# Altium PCB PCB.PcbDoc
Units mm, origin at the board's own origin, x right, y up, seen from the top; angles counter-clockwise.
Board outline 33 x 21 mm, 2 copper layers (Top Layer, Bottom Layer); 34 components, 34 nets, 136 pads, 32 vias.
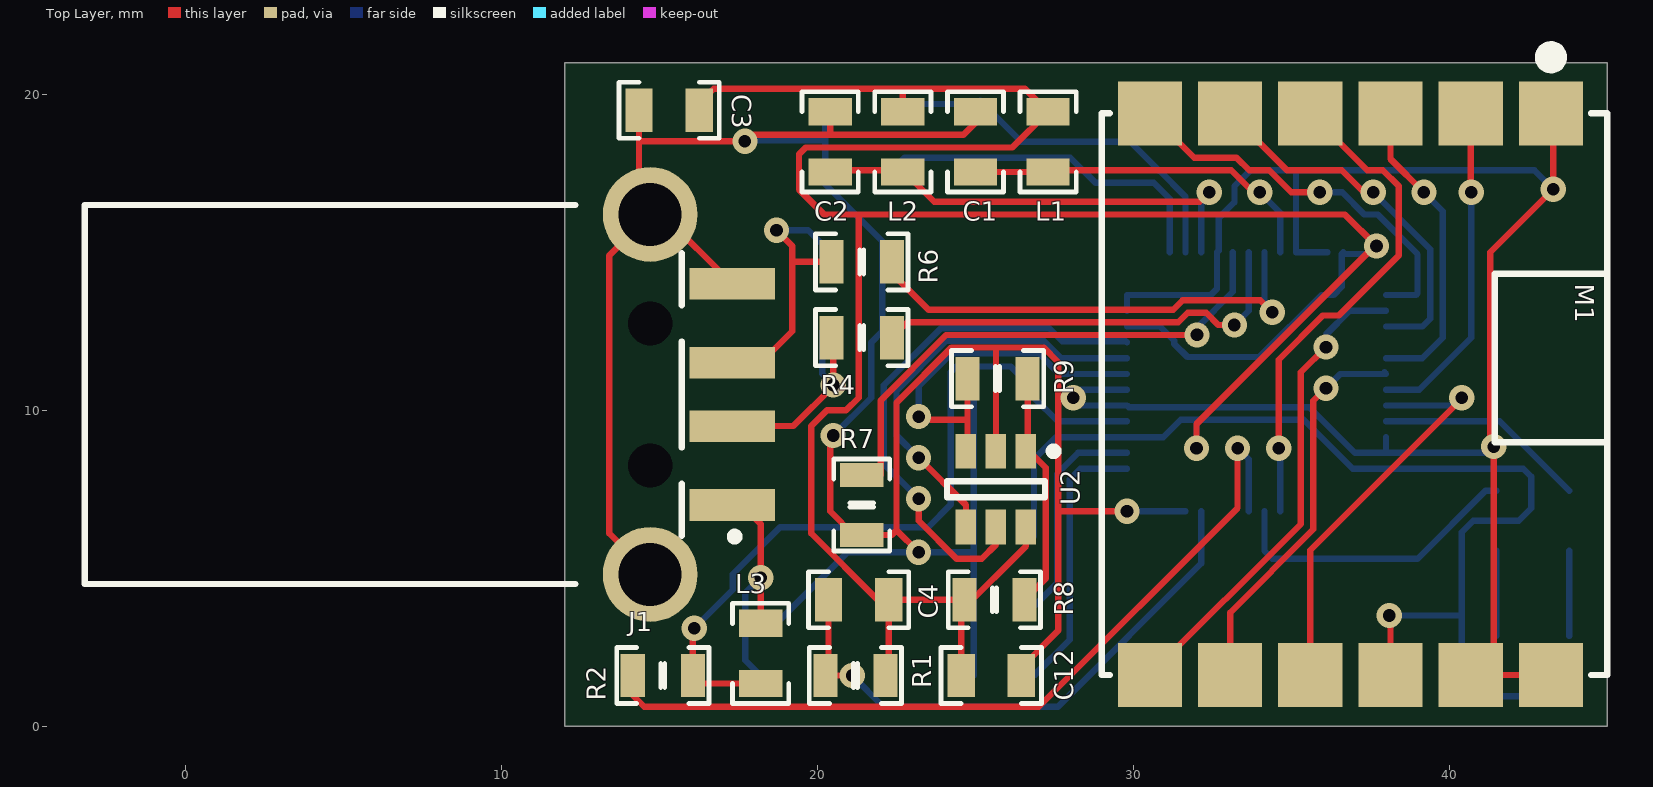
[diagram p0: Top Layer view]
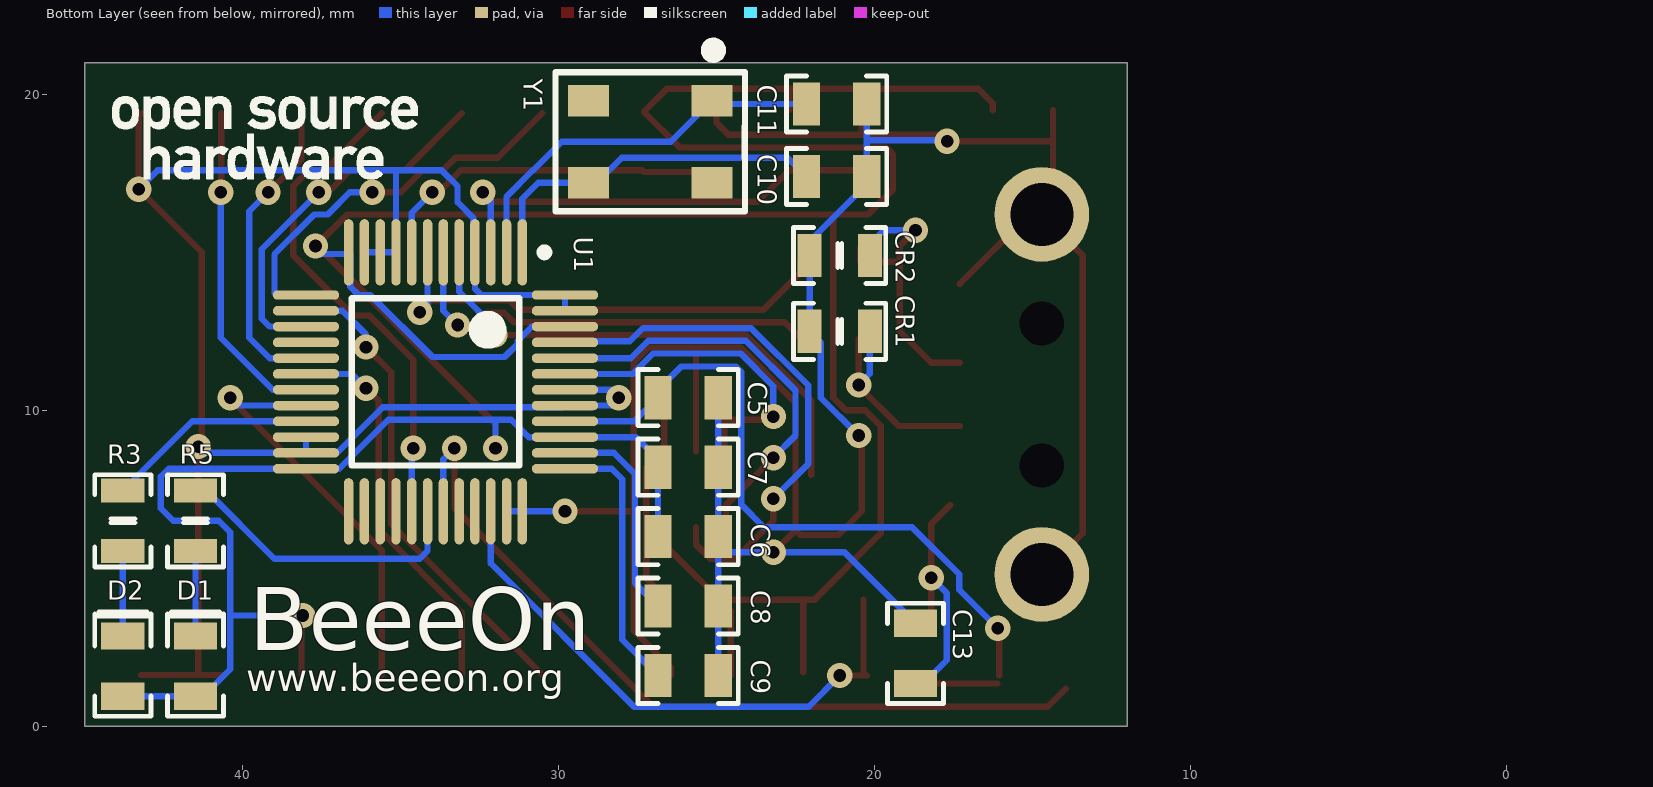
[diagram p1: Bottom Layer view, seen from below]

## Layer stack, top to bottom
Top Layer: signal copper 0.0356
Dielectric: dielectric 0.32, FR-4, Dk 4.8
Bottom Layer: signal copper 0.0356

## Board outline
12,21 12,0 45,0 45,21

## Design rules (kind name [scope] priority, off if disabled: settings)
Clearance [All] p1: gap=0.2
HoleSize [All] p1: absolutevalues=TRUE maxlimit=2.54 minlimit=0.4 maxpercent=80.000 minpercent=20.000
HoleToHoleClearance [All] p1: gap=0.4 allowstackedmicrovias=TRUE
MinimumSolderMaskSliver [All] p1: minsoldermaskwidth=0.2
PolygonConnect [All] p1: connectstyle=Direct reliefconductorwidth=0.254 reliefentries=4 polygonreliefangle="90 Angle"
RoomDefinition system [InComponentClass('system')] p1 off: confinementstyle=ConfineIn formatcopy=TRUE lockcomponents=FALSE outline 12.7,24.5 28.1,24.5 28.1,31.7 12.7,31.7
RoutingVias [All] p1: holewidth=0.4 width=0.8 viastyle="Through Hole" minholewidth=0.4 minwidth=0.8 maxholewidth=2 maxwidth=2
SilkToSilkClearance [All] p1: silktosilkclearance=0.1
SilkscreenOverComponentPads [All] p1: minsilkscreentomaskgap=0.1
SolderMaskExpansion [All] p1: expansion=0.102
Width [All] p1: maxlimit=1 minlimit=0.2 preferedwidth=0.2
23 further rules are at their usual default settings.

## Components (designator, comment, footprint, x,y, rotation, side; value= is the part's Value field where it differs from the comment)
C1 "100nF" C0805 25,18.5 r90 top
C2 "100nF" C0805 20.4,18.5 r90 top
C3 "100nF" C0805 15.3,19.5 r0 top
C4 "100nF" C0805 21.3,4 r180 top
C5 "100nF" C0805 25.9,10.4 r180 bottom
C6 "4.7uF" C0805 25.9,6 r180 bottom
C7 "100n" C0805 25.9,8.2 r180 bottom
C8 "100n" C0805 25.9,3.8 r180 bottom
C9 "100n" C0805 25.9,1.6 r180 bottom
C10 "27pF" C0805 21.2,17.4 r180 bottom
C11 "27pF" C0805 21.2,19.7 r180 bottom
C12 "100n" C0805 25.5,1.6 r180 top
C13 "10nF" C0805 18.7,2.3 r270 bottom
CR1 "VC080505A150" R0805 21.1,12.5 r180 bottom
CR2 "VC080505A150" R0805 21.1,14.9 r180 bottom
D1 "LED" D0805 41.5,1.9 r270 bottom
D2 "LED" D0805 43.8,1.9 r270 bottom
J1 "USB-A-REC" USB/SM2.5-4H4A 12,10.5 r180 top locked
L1 "600R/0.5A" L0805 27.3,18.5 r270 top
L2 "600R/0.5A" L0805 22.7,18.5 r270 top
L3 "600R/0.5A" L0805 18.2,2.3 r270 top
M1 "MRF89XAM8A" MRF89XAM8A 29,19.4 r270 top locked
R1 "10k" R0805 21.2,1.6 r0 top
R2 "39k" R0805 15.1,1.6 r180 top
R3 "1k" R0805 43.8,6.5 r270 bottom
R4 "10R" R0805 21.4,12.3 r0 top
R5 "1k" R0805 41.5,6.5 r270 bottom
R6 "10R" R0805 21.4,14.7 r0 top
R7 "12k" R0805 21.4,7 r90 top
R8 "10k" R0805 25.6,4 r180 top
R9 "2k" R0805 25.7,11 r0 top
U1 "FT232HL" LQFP-48_M 33.9,10.9 r270 bottom locked
U2 "93LC56BT-I/OT" SOT-23-OT6_N 25.65,7.5 r270 top
Y1 "12MHz" "OSC 5.0X3.2" 27.1,18.5 r270 bottom

## Footprints (in the part's own frame and the unit in brackets; to place one, negate y for a bottom-side part, rotate by r counter-clockwise, add the part's x,y. Pads: shape width x height; smd on the part's side, far side on the other; paste and mask are expansions set on the pad)
C0805 [mil] "Capacitor SMD 0805; 2.0 x 1.2 mm"
  rect 34x54 smd: 1(-37.5,0) 2(37.5,0)
  silkscreen extent -62,-35 62,35, body extent -39,-24 43,24, height 69
D0805 [mil] "LED SMD 0805; 2.0 x 1.2 mm"
  rect 34x54 smd: 1(37.5,0) 2(-37.5,0)
  silkscreen extent -68,-35 63,35, body extent -39,-24 43,24, height 69
L0805 [mil] "Inductor SMD 0805; 2.0 x 1.2 mm"
  rect 34x54 smd: 1(-37.5,0) 2(37.5,0)
  silkscreen extent -63,-35 63,35, body extent -39,-24 43,24, height 69
LQFP-48_M [mm] "48-Pin Thin Quad Flat Pack 0.5 mm Pitch, IPC Low Density"
  oval 2.1x0.3 smd: 1(-4.1,2.75) 2(-4.1,2.25) 3(-4.1,1.75) 4(-4.1,1.25) 5(-4.1,0.75) 6(-4.1,0.25) 7(-4.1,-0.25) 8(-4.1,-0.75) 9(-4.1,-1.25) 10(-4.1,-1.75) 11(-4.1,-2.25) 12(-4.1,-2.75) 25(4.1,-2.75) 26(4.1,-2.25) 27(4.1,-1.75) 28(4.1,-1.25) 29(4.1,-0.75) 30(4.1,-0.25) 31(4.1,0.25) 32(4.1,0.75) 33(4.1,1.25) 34(4.1,1.75) 35(4.1,2.25) 36(4.1,2.75)
  oval 0.3x2.1 smd: 13(-2.75,-4.1) 14(-2.25,-4.1) 15(-1.75,-4.1) 16(-1.25,-4.1) 17(-0.75,-4.1) 18(-0.25,-4.1) 19(0.25,-4.1) 20(0.75,-4.1) 21(1.25,-4.1) 22(1.75,-4.1) 23(2.25,-4.1) 24(2.75,-4.1) 37(2.75,4.1) 38(2.25,4.1) 39(1.75,4.1) 40(1.25,4.1) 41(0.75,4.1) 42(0.25,4.1) 43(-0.25,4.1) 44(-0.75,4.1) 45(-1.25,4.1) 46(-1.75,4.1) 47(-2.25,4.1) 48(-2.75,4.1)
  silkscreen extent -4.22,-2.65 2.65,3.57, body extent -3.5,-3.5 3.5,3.5, height 1.45
MRF89XAM8A [mil] "868MHz Ultra-Low Power  Sub-GHz Transceiver Module"
  rect 80x80 smd: 1(0,560) 2(0,460) 3(0,360) 4(0,260) 5(0,160) 6(0,60) 7(700,60) 8(700,160) 9(700,260) 10(700,360) 11(700,460) 12(700,560)
  silkscreen extent -80,0 700,630, body extent 0,0 700,1100, height 5
"OSC 5.0X3.2" [mm] "Oscilator Ceramic Package 5.0x3.2 mm"
  rect 1x1.3 smd: 1(-1.3,1.95) 2(-1.3,-1.95) 3(1.3,-1.95) 4(1.3,1.95)
  silkscreen extent -3.1,-3 2.2,3, body extent -1.6,-2.5 1.6,2.5, height 1.75
R0805 [mil] "Resistor SMD 0805; 2.0 x 1.2 mm"
  rect 30x54 smd: 1(-37.5,0) 2(37.5,0)
  silkscreen extent -58,-35 58,35, body extent -39,-24 43,24, height 69
SOT-23-OT6_N [mm] "SOT23, 6-Leads, Body 2.9x1.6mm, Pitch 0.95mm, Lead Span 2.7mm, IPC Medium Density"
  rect 1.1x0.65 smd: 1(-1.2,0.95) 2(-1.2,0) 3(-1.2,-0.95) 4(1.2,-0.95) 5(1.2,0) 6(1.2,0.95)
  silkscreen extent -1.32,-1.55 0.25,1.95, body extent -0.9,-1.55 0.9,1.55, height 1.45
USB/SM2.5-4H4A [mm] "Connector; USB1.1, Type A, SM; 4 Position; Right Angle"
  rect 2.7x1 smd: 1(-5.3,3.5) 2(-5.3,1) 3(-5.3,-1) 4(-5.3,-3.5)
  round 3 hole 2: 5(-2.7,-5.7) 6(-2.7,5.7)
  round 1.2 hole 1.4 unplated: MH1(-2.7,-2.25) MH2(-2.7,2.25)
  silkscreen extent -5.5,-6 15.2,6, body extent -3.7,-6 15.2,6, height 4.5

## Part data
C1 C2 C3 C4 C5 C6 C7 C8 C9 C10 C11 C12 C13: library part Cap, "Capacitor"
CR1 CR2: library part "ESD Protection", "Multilayer Ceramic Transient Voltage Suppressors"
D1 D2: library part LED2, "Typical RED, GREEN, YELLOW, AMBER GaAs LED"
J1: library part USB-A_MALE, "USB 1.1, Right Angle, Thru-Hole, Reverse Type, 4 Position, Black"
L1 L2 L3: library part "Inductor Ferrite Bead", "Inductor Ferrite Bead, BLM18PG"
M1: "868 MHz Ultra-Low Power  Sub-GHz Transceiver Module"
R1 R2 R3 R4 R5 R6 R7 R8 R9: library part Res2, "Resistor"
U1: "Single Channel HiSpeed USB to Multipurpose   UART/FIFO IC"
U2: "2K, 128x16-bit, 2.5V Microwire Serial EEPROM, 6-Pin SOT-23, Industrial Temperature, Tape and Reel"
Y1: library part XTAL_ABM3, "Crystal"

## Via types
v1: diameter 0.8, hole 0.4, Top Layer to Bottom Layer, tented both sides, 32 vias

## Nets (pads, with @x,y where several pads share a name; then routed paths per layer and width w, separated by ;. In a path a pad name is that pad's centre, name@x,y a point inside that pad or via, vN(x,y) a via of type N, cw(c..) or ccw(c..) an arc to the next point about the centre after c; other vN are vias at no path point)
3.3V: C3.2 C4.1 C6.1 C7.1 C12.2 D1.1 D2.1 L1.1 L2.1 M1.10 R1.2 R8.2 U1.12 U1.24 U1.39 U1.46 U2.6 | length 121.1
  Top Layer w0.2: C3.2 16.252,19.721 16.716,20.184 22.7,20.184 ; R1.2@22.253,1.7 C4.1 ; L2.1@22.7,19.505 22.7,20.184 ; C12.2 24.547,3.647 26.6,5.7 U2.6 ; R8.2 C4.1 ; v1(32,8.8) 32,9.566 37.634,15.2 v1(37.7,15.2) 36.7,16.2 35.61,16.2 21.3,16.2 ; v1(38.1,3.5) 38.144,3.456 M1.10 ; 21.3,16.2 20.206,16.2 19.414,16.991 19.414,18.104 19.631,18.321 26.168,18.321 L1.1 26.568,20.184 22.7,20.184 ; 21.3,16.2 21.3,10.4 20.9,10 20.3,10 19.8,9.5 19.8,6.1 21.9,4 C4.1
  Bottom Layer w0.2: C6.1 C7.1 26.852,8.452 27.55,9.15 U1.39 30.95,9.15 31.5,9.7 32,9.7 ; U1.46 30.85,12.65 31.3,12.2 31.3,12.1 31.714,11.686 33.996,11.686 35.96,13.65 36.336,13.65 36.6,13.914 U1.12@36.6,14.95 ; v1(32,8.8) 32,9.7 ; U1.12 U1.12@36.6,14.95 ; v1(37.7,15.2) 37.45,14.95 U1.12@36.6,14.95 ; v1(38.1,3.5) 40.4,3.5 ; D2.1 D1.1 41.253,0.947 40.4,1.8 40.4,3.5 ; 32,9.7 35.4,9.7 36.95,8.15 U1.24 42.35,8.15 42.6,7.9 42.6,6.9 42.2,6.5 40.766,6.5 40.4,6.134 40.4,3.5
ACBUS0: R3.1 U1.21 | length 6.7
  Bottom Layer w0.2: U1.21 41.602,9.65 R3.1
ACBUS5: M1.4 U1.29 | length 15.9
  Top Layer w0.2: v1(34.6,8.8) 34.6,11.6 36,13 36.29,13 36.5,13 38.4,14.9 38.4,17.1 37.9,17.6 37.404,17.6 M1.4
  Bottom Layer w0.2: v1(34.6,8.8) 34.65,8.75 U1.29
ACBUS6: R5.1 U1.30 | length 9.6
  Bottom Layer w0.2: U1.30 34.15,5.55 34.4,5.3 39,5.3 41.153,7.452 R5.1
EECLK: U1.44 U2.4 | length 13.4
  Top Layer w0.2: v1(23.2,8.5) 24.7,7 U2.4
  Bottom Layer w0.2: v1(23.2,8.5) 22.5,9.2 22.5,10.626 24.074,12.2 27.166,12.2 27.716,11.65 U1.44
EECS: U1.45 U2.5 | length 17.1
  Top Layer w0.2: v1(23.2,7.2) 23.2,6.501 24.401,5.3 25.2,5.3 25.65,5.75 U2.5
  Bottom Layer w0.2: v1(23.2,7.2) 22.1,8.3 22.1,10.791 23.909,12.6 27.331,12.6 27.746,12.186 29.764,12.186 U1.45
EEDATA: R9.1 U1.43 U2.3 | length 11.7
  Top Layer w0.2: 23.6,9.7 24.747,9.7 ; U2.3@24.747,8.747 24.747,9.7 ; R9.1 24.747,9.7
  Bottom Layer w0.2: v1(23.2,9.8) 23.2,10.76 24.24,11.8 27,11.8 27.65,11.15 U1.43
GND: C1.2 C2.2 C3.1 C5.2 C6.2 C7.2 C8.2 C9.2 C10.2 C11.2 C12.1 C13.1 CR1.1 CR2.1 J1.4 J1.5 J1.6 M1.1 M1.11 M1.12 R7.1 U1.4 U1.9 U1.10 U1.11 U1.22 U1.23 U1.35 U1.36 U1.41 U1.42 U1.47 U1.48 U2.2 | length 153.9
  Top Layer w0.2: J1.5@14.347,16.552 C3.1 ; 14.362,18.514 v1(17.7,18.514) 17.907,18.721 20.4,18.721 ; J1.6 13.4,6.1 13.4,14.9 J1.5 15.1,16.2 J1.4 ; v1@20.4,9.1 20.4,6.8 21.152,6.048 R7.1 22.347,6.048 22.5,6.2 ; C2.2 20.4,18.721 ; v1(23.2,5.5) 22.5,6.2 ; C1.2 25,19.1 24.621,18.721 20.4,18.721 ; U2.2 25.65,11.986 ; C12.1 26.452,1.853 27.625,3.025 27.625,11.519 27.158,11.986 25.65,11.986 ; 27.625,6.8 v1(29.8,6.8) ; 27.625,10.4 v1(28.1,10.4) v1@28,10.5 ; M1.11 M1.12 ; M1.11@41.413,1.707 v1(41.413,8.85) ; v1@41.463,8.8 v1(41.413,8.85) ; M1.1 43.3,19.324 v1(43.3,17) 41.3,15 41.3,8.963 v1(41.413,8.85) ; 22.5,6.2 22.5,10.244 24.242,11.986 25.65,11.986
  Bottom Layer w0.2: v1(17.7,18.514) 17.736,18.55 20.248,18.55 ; C13.1 20.947,5.5 v1(23.2,5.5) C6.2@24.947,5.5 ; C11.2 20.248,18.55 ; v1(20.5,9.2) 21.7,10.4 21.7,12.147 CR1.1 CR2.1 22.053,15.347 20.248,17.152 C10.2 20.248,18.55 ; C9.2 C8.2 C6.2@24.947,5.5 ; C5.2 C7.2 C6.2 C6.2@24.947,5.5 ; v1(28.1,10.4) 28.35,10.65 U1.42 ; v1@28.35,10.15 U1.41 29.85,10.1 35.566,10.1 37.016,8.65 U1.23 ; v1(29.8,6.8) U1.36 U1.35 ; U1.47 U1.48 32.45,13.65 32.65,13.85 U1.4 32.7,15.05 32.7,16.086 33.2,16.586 33.2,17.09 33.71,17.6 35.15,17.6 ; U1.11 U1.10 U1.9 35.15,17.6 ; U1.22 U1.23 ; v1(41.413,8.85) 41.213,8.65 U1.23 ; v1(43.3,17) 42.7,17.6 35.15,17.6
GPIOL0: M1.3 U1.17 | length 9.9
  Top Layer w0.2: M1.3 38.144,17.956 v1(39.2,16.9)
  Bottom Layer w0.2: U1.17 39.15,11.65 39.8,12.3 39.8,16.3 v1(39.2,16.9)
GPIOL1: M1.8 U1.18 | length 12.5
  Top Layer w0.2: M1.8 33.064,3.594 35.7,6.23 35.7,10.3 v1(36.1,10.7)
  Bottom Layer w0.2: v1(36.1,10.7) 36.55,11.15 U1.18 U1.18@37.95,11.2
GPIOL2: M1.2 U1.19 | length 10.6
  Top Layer w0.2: M1.2 40.684,17.016 40.7,17 v1(40.7,16.9)
  Bottom Layer w0.2: U1.19 39.05,10.65 40.7,12.3 v1@40.7,17
GPIOL3: M1.9 U1.20 | length 13.3
  Top Layer w0.2: M1.9 35.604,5.569 v1@40.418,10.382
  Bottom Layer w0.2: U1.20 40.15,10.15 v1(40.4,10.4)
NetC1_1: C1.1 L1.2 U1.8 | length 11.4
  Top Layer w0.2: C1.1 L1.2 27.353,17.6 33.1,17.6 v1@33.7,17
  Bottom Layer w0.2: v1@33.7,16.9 v1(34,16.9) 34.65,16.25 U1.8
NetC2_1: C2.1 L2.2 U1.3 | length 14.5
  Top Layer w0.2: C2.1@20.4,17.6 22.7,17.6 23.7,16.6 32.1,16.6 v1(32.4,16.9)
  Bottom Layer w0.2: U1.3 32.15,16.65 v1(32.4,16.9)
NetC4_2: C4.2 R1.1 U1.34 | length 18.1
  Top Layer w0.2: R1.1 v1(21.1,1.6) ; R1.1@20.348,1.7 C4.2
  Bottom Layer w0.2: v1(21.1,1.6) 22.086,0.614 27.614,0.614 32.15,5.15 U1.34
NetC8_1: C8.1 U1.38 | length 7
  Bottom Layer w0.2: C8.1 27.584,4.532 27.584,7.984 28.25,8.65 U1.38
NetC9_1: C9.1 U1.37 | length 8.6
  Bottom Layer w0.2: C9.1 27.984,2.732 27.984,7.819 28.316,8.15 U1.37
NetC10_1: C10.1 U1.1 Y1.3 | length 11.5
  Bottom Layer w0.2: C10.1 22.753,18 28,18 28.8,17.2 Y1.3 30.65,17.2 31.15,16.7 U1.1
NetC11_1: C11.1 U1.2 Y1.1 | length 12.4
  Bottom Layer w0.2: C11.1 Y1.1@25.05,19.7 ; Y1.1 26.45,18.5 29.9,18.5 30.8,17.6 30.816,17.6 31.65,16.766 U1.2
NetC13_2: C13.2 J1.1 L3.1 | length 8.1
  Top Layer w0.2: J1.1@17.6,7 18.2,6.4 v1(18.2,4.7) L3.1
  Bottom Layer w0.2: v1(18.2,4.7) 17.714,4.214 17.714,2.086 18.452,1.348 C13.2
NetCR1_2: CR1.2 J1.2 R4.1 | length 7.1
  Top Layer w0.2: J1.2 19.234,9.5 20.5,10.766 v1(20.5,10.8) R4.1@20.5,12.248
  Bottom Layer w0.2: CR1.2 20.148,11.152 v1(20.5,10.8)
NetCR2_2: CR2.2 J1.3 R6.1 | length 9.4
  Top Layer w0.2: J1.3 18.2,11.5 19.2,12.5 19.2,14.7 ; v1(18.7,15.7) 19.2,15.2 19.2,14.7 ; R6.1@20.448,15.152 R6.1 19.2,14.7
  Bottom Layer w0.2: v1(18.7,15.7) 19.7,15.7 20.148,15.252 CR2.2
NetD1_2: D1.2 R5.2 | length 2.7
  Bottom Layer w0.2: D1.2 R5.2
NetD2_2: D2.2 R3.2 | length 2.7
  Bottom Layer w0.2: D2.2 R3.2
NetR4_2: R4.2 U1.6 | length 13.8
  Top Layer w0.2: R4.2 22.838,12.786 31.424,12.786 31.724,13.086 32.304,13.086 32.69,12.7 v1(33.2,12.7)
  Bottom Layer w0.2: v1(33.2,12.7) 33.65,13.15 U1.6
NetR6_2: R6.2 U1.7 | length 15.2
  Top Layer w0.2: R6.2 22.353,14.347 23.514,13.186 31.259,13.186 31.559,13.486 34.014,13.486 v1(34.4,13.1)
  Bottom Layer w0.2: U1.7 34.15,13.35 v1(34.4,13.1)
NetR7_2: R7.2 U1.5 | length 16.3
  Top Layer w0.2: R7.2@22,7.953 22,10.309 24.077,12.386 v1(32.014,12.386)
  Bottom Layer w0.2: v1(32.014,12.386) 32.014,12.614 33.15,13.75 U1.5
NetR8_1: R8.1 R9.2 U2.1 | length 7.5
  Top Layer w0.2: R8.1 27.225,4.673 27.225,8.18 26.652,8.752 R9.2
TCK: M1.6 U1.13 | length 12.6
  Top Layer w0.2: M1.6 31.924,18 33.266,18 33.666,17.6 34.3,17.6 35,16.9 v1(35.9,16.9)
  Bottom Layer w0.2: v1(35.9,16.9) 36.61,16.9 37.31,16.2 37.734,16.2 39,14.934 39,13.7 38.95,13.65 U1.13
TDI: M1.7 U1.14 | length 15.3
  Top Layer w0.2: M1.7 35.3,6.396 35.3,11.2 v1(36.1,12)
  Bottom Layer w0.2: v1(36.1,12) 36.1,12.4 36.85,13.15 U1.14
TDO: M1.5 U1.15 | length 11.8
  Top Layer w0.2: M1.5 33.066,19.4 34.866,17.6 36.6,17.6 37.3,16.9 v1(37.6,16.9)
  Bottom Layer w0.2: v1(37.6,16.9) 39.4,15.1 39.4,12.9 39.15,12.65 U1.15
TMS: U1.16
VBUS: C5.1 L3.2 R2.1 U1.40 | length 24.3
  Top Layer w0.2: R2.1 v1@16.053,3.052 ; R2.1@16.105,1.348 L3.2
  Bottom Layer w0.2: v1(16.1,3.1) 17.314,4.314 17.314,4.804 18.81,6.3 23.5,6.3 24.216,7.016 24.216,11.21 24.391,11.386 26.114,11.386 26.852,10.648 C5.1 27.602,9.65 U1.40
VBUSDTCT: R2.2 U1.31 | length 26.2
  Top Layer w0.2: R2.2@13.948,1.181 14.514,0.614 27.009,0.614 33.3,6.906 v1(33.3,8.8)
  Bottom Layer w0.2: v1(33.3,8.8) 33.65,8.45 U1.31
pads on no net: J1.MH1 J1.MH2 U1.25 U1.26 U1.27 U1.28 U1.32 U1.33 Y1.2 Y1.4

## Silkscreen, mask and mechanical layers (free items; w line width, h text height)
Bottom Overlay:
  drawing of 2352 lines, arcs and shapes, not listed
  text "BeeeOn" at 39.8,2.4 h2
  text "www.beeeon.org" at 39.9,1.1 h0.87
Mechanical 1:
  the board outline again, w0.2